# EAGLE board Self Balancing Bot (EAGLE 7.6.0)
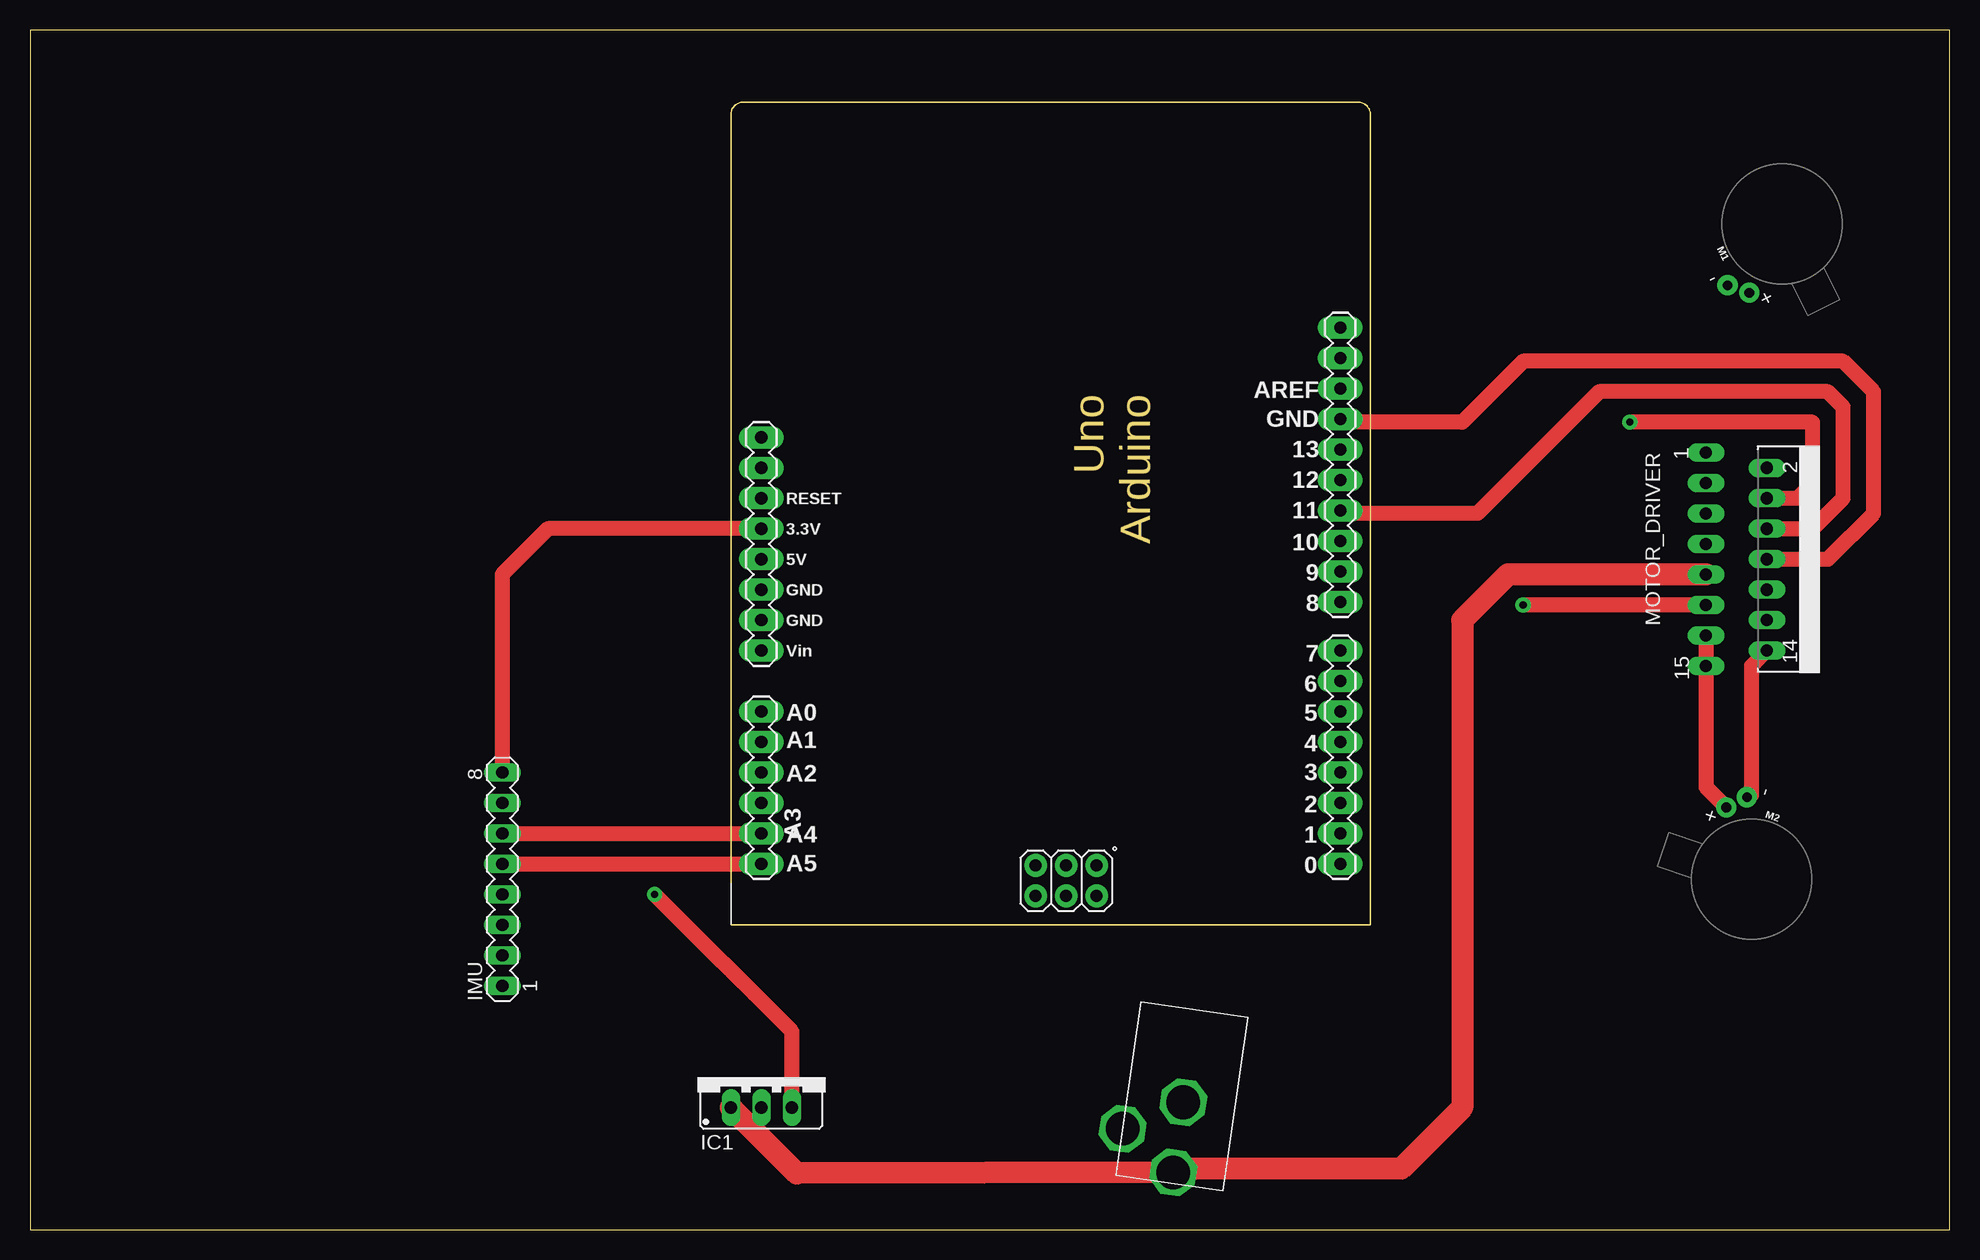
[diagram p0: board, top side]
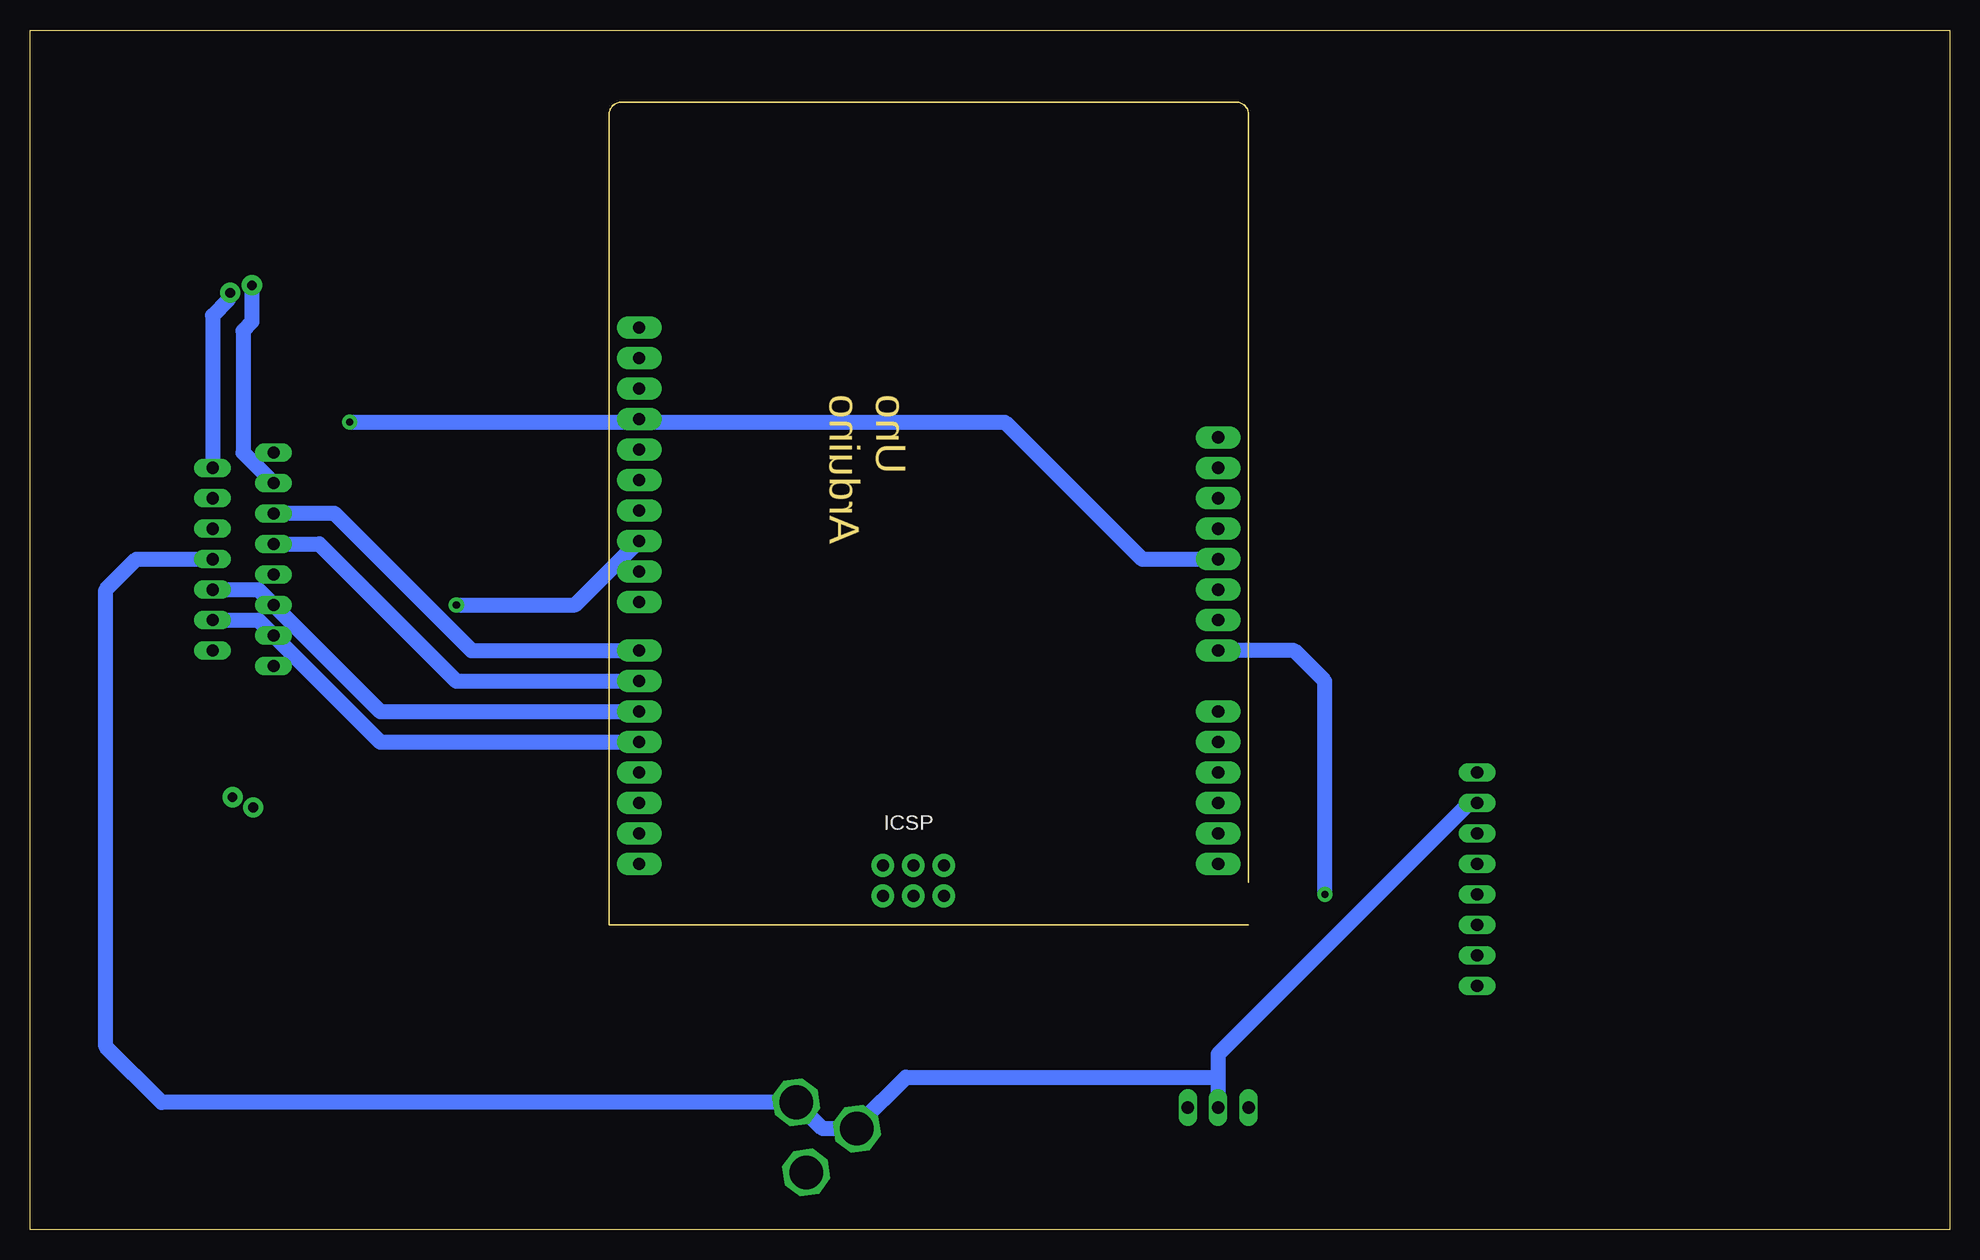
[diagram p1: board, bottom side, seen from below]

Size 160 x 100 mm. Coordinates in mm from the lower left corner, seen from the top.
Outline: 0,0 160,0 160,100 0,100 0,0
Copper layers (1*16): Top 0.035mm / dielectric 1.5mm / Bottom 0.035mm
Design rules "default": minimum track width 10mil, minimum drill 24mil, track to track 8mil, track to pad 8mil, pad to pad 8mil, via to via 8mil, smd to smd 8mil, copper to edge 40mil, drill to drill 8mil, minimum pad ring 10mil, minimum via ring 8mil, stop-mask expansion 4mil, vias tented up to drill 0mil, thermal gap 10mil
Net classes: 0 default: width 1.27 mm, drill 1.27 mm, clearance 0.254 mm

## Footprints (pad centres in the part's own frame; a part is rotated, then mirrored left to right if it is on the bottom)
ARDUINO_UNO = drill 1.016 pad 1.88 long: 0 63.5,50.8; 1 60.96,50.8; 2 58.42,50.8; 3 55.88,50.8; 3.3V 35.56,2.54; 4 53.34,50.8; 5 50.8,50.8; 5V 38.1,2.54; 6 48.26,50.8; 7 45.72,50.8; 8 41.656,50.8; 9 39.116,50.8; 10 36.576,50.8; 11 34.036,50.8; 12 31.496,50.8; 13 28.956,50.8; A0 50.8,2.54; A1 53.34,2.54; A2 55.88,2.54; A3 58.42,2.54; A4 60.96,2.54; A5 63.5,2.54; AREF 23.876,50.8; GND 26.416,50.8; GND. 43.18,2.54; GND.. 40.64,2.54; I/OREF 30.48,2.54; N/C 27.94,2.54; RESET 33.02,2.54; SCL 18.796,50.8; SDA 21.336,50.8; VIN 45.72,2.54 | drill 1.016 pad 1.88: +5V 66.167,30.48; GND_ 66.167,25.4; MISO 63.627,30.48; MOSI 66.167,27.94; RESET. 63.627,25.4; SCK 63.627,27.94
POWER_JACK = drill 2.8 pad 3.81 octagon: RING 0.1,-3.39; RING_SW -4.6,-6.29; TIP 0.1,-9.29
78XXS = drill 1.016 long: GND 0,-2.54; IN -2.54,-2.54; OUT 2.54,-2.54
MA08-1 = drill 1.016 long: 1 -8.89,0; 2 -6.35,0; 3 -3.81,0; 4 -1.27,0; 5 1.27,0; 6 3.81,0; 7 6.35,0; 8 8.89,0
VIBE-MOTOR-10MM = drill 0.8 pad 1.676: + -5,-3.9; - -6.35,-2.54
MULTIWATT-15 = drill 1.016 long: 1 -8.89,-7.62; 2 -7.62,-2.54; 3 -6.35,-7.62; 4 -5.08,-2.54; 5 -3.81,-7.62; 6 -2.54,-2.54; 7 -1.27,-7.62; 8 0,-2.54; 9 1.27,-7.62; 10 2.54,-2.54; 11 3.81,-7.62; 12 5.08,-2.54; 13 6.35,-7.62; 14 7.62,-2.54; 15 8.89,-7.62

## Placement (x,y rotation side)
ARDUINO_UNO  ARDUINO_UNO  [ARDUINO_UNO]  58.42,93.98 270 top
BATT  2.1MM_POWER_JACKTHM  [POWER_JACK]  96.52,13.97 351.8 top
IC1  [78XXS]  60.96,12.7 0 top
IMU  [MA08-1]  39.37,29.21 90 top
M1  MOTOR10MM  [VIBE-MOTOR-10MM]  146.05,83.82 26.5 top
M2  MOTOR10MM  [VIBE-MOTOR-10MM]  143.51,29.21 251.5 top
MOTOR_DRIVER  L298  [MULTIWATT-15]  147.32,55.88 270 top

## Library data of the parts
ARDUINO_UNO BATT IC1 = robocon
IMU = robocon; OC_FARNELL: unknown; OC_NEWARK: unknown
M1 M2 = SparkFun-Electromechanical; PROD_ID: COMP-08572; SF_SKU: ROB-08449
MOTOR_DRIVER = st-microelectronics

## Nets
ADO: IMU.2
ENA: ARDUINO_UNO.11 MOTOR_DRIVER.6
ENB: ARDUINO_UNO.10 MOTOR_DRIVER.11
GND: ARDUINO_UNO.GND BATT.RING BATT.RING_SW IC1.GND IMU.7 MOTOR_DRIVER.8
IN1: ARDUINO_UNO.7 MOTOR_DRIVER.5
IN2: ARDUINO_UNO.6 MOTOR_DRIVER.7
IN3: ARDUINO_UNO.5 MOTOR_DRIVER.10
IN4: ARDUINO_UNO.4 MOTOR_DRIVER.12
INT: IMU.1
OUT1: M1.+ MOTOR_DRIVER.2
OUT2: M1.- MOTOR_DRIVER.3
OUT3: M2.+ MOTOR_DRIVER.13
OUT4: M2.- MOTOR_DRIVER.14
SCL: ARDUINO_UNO.A4 IMU.6
SDA: ARDUINO_UNO.A5 IMU.5
VCC: BATT.TIP IC1.IN MOTOR_DRIVER.9
VDD: ARDUINO_UNO.3.3V IMU.8
VIN: ARDUINO_UNO.VIN IC1.OUT
VS: ARDUINO_UNO.5V MOTOR_DRIVER.4
XCL: IMU.3
XDA: IMU.4

## Tracks (layer width: path | path; a pad name or v marks a point on that pad's centre or on a via)
ENA
  Top 1.27: MOTOR_DRIVER.6 148.59,58.42 151.13,60.96 151.13,68.58 149.86,69.85 130.81,69.85 120.65,59.69 109.47,59.69 ARDUINO_UNO.11
ENB  (via drill 0.6 pad 1.27)
  Top 1.27: MOTOR_DRIVER.11 v124.46,52.07
  Bottom 1.27: v124.46,52.07 114.55,52.07 ARDUINO_UNO.10
GND
  Top 1.27: MOTOR_DRIVER.8 149.86,55.88 153.67,59.69 153.67,69.85 151.13,72.39 124.46,72.39 119.38,67.31 109.47,67.31 ARDUINO_UNO.GND
  Bottom 1.27: 60.96,12.7 60.96,14.61 40.01,35.56 IMU.7 | 60.96,12.7 IC1.GND | 60.96,12.7 87,12.7 90.81,8.89 BATT.RING_SW 93.94,8.4 BATT.RING 149.03,10.6 153.67,15.24 153.67,53.34 151.13,55.88 MOTOR_DRIVER.8
IN1
  Bottom 1.27: ARDUINO_UNO.7 123.19,48.26 134.62,59.69 MOTOR_DRIVER.5
IN2
  Bottom 1.27: MOTOR_DRIVER.7 135.89,57.15 124.46,45.72 ARDUINO_UNO.6
IN3
  Bottom 1.27: MOTOR_DRIVER.10 140.97,53.34 130.81,43.18 ARDUINO_UNO.5
IN4
  Bottom 1.27: MOTOR_DRIVER.12 140.97,50.8 130.81,40.64 ARDUINO_UNO.4
OUT1
  Bottom 1.27: MOTOR_DRIVER.2 144.78,76.2 143.51,77.47 M1.+
OUT2
  Bottom 1.27: M1.- 141.5,75.67 142.24,74.93 142.24,64.77 MOTOR_DRIVER.3
OUT3
  Top 1.27: MOTOR_DRIVER.13 139.7,36.89 M2.+
OUT4
  Top 1.27: MOTOR_DRIVER.14 143.51,46.99 143.51,36.2 M2.-
SCL
  Top 1.27: IMU.6 ARDUINO_UNO.A4
SDA
  Top 1.27: IMU.5 ARDUINO_UNO.A5
VCC
  Top 1.829: IC1.IN 63.9,4.68 BATT.TIP 95.61,5.08 114.3,5.08 119.38,10.16 119.38,50.8 123.19,54.61 MOTOR_DRIVER.9
VDD
  Top 1.27: ARDUINO_UNO.3.3V 43.18,58.42 39.37,54.61 IMU.8
VIN  (via drill 0.6, 0.6 pad 1.27)
  Top 1.27: IC1.OUT 63.5,16.51 v52.07,27.94
  Bottom 1.27: v52.07,27.94 52.07,45.72 54.61,48.26 ARDUINO_UNO.VIN
VS  (via drill 0.6 pad 1.27)
  Top 1.27: MOTOR_DRIVER.4 147.32,60.96 148.59,62.23 148.59,67.31 v133.35,67.31
  Bottom 1.27: v133.35,67.31 78.74,67.31 67.31,55.88 ARDUINO_UNO.5V